# Altium PCB PCB1.pcbdoc
Units mil, origin at the board's own origin, x right, y up, seen from the top; angles counter-clockwise.
Board outline 5554.02 x 5905.51 mil, 2 copper layers (Top Layer, Bottom Layer), stack 62.206 mil thick; 123 components, 66 nets, 348 pads, 126 vias.
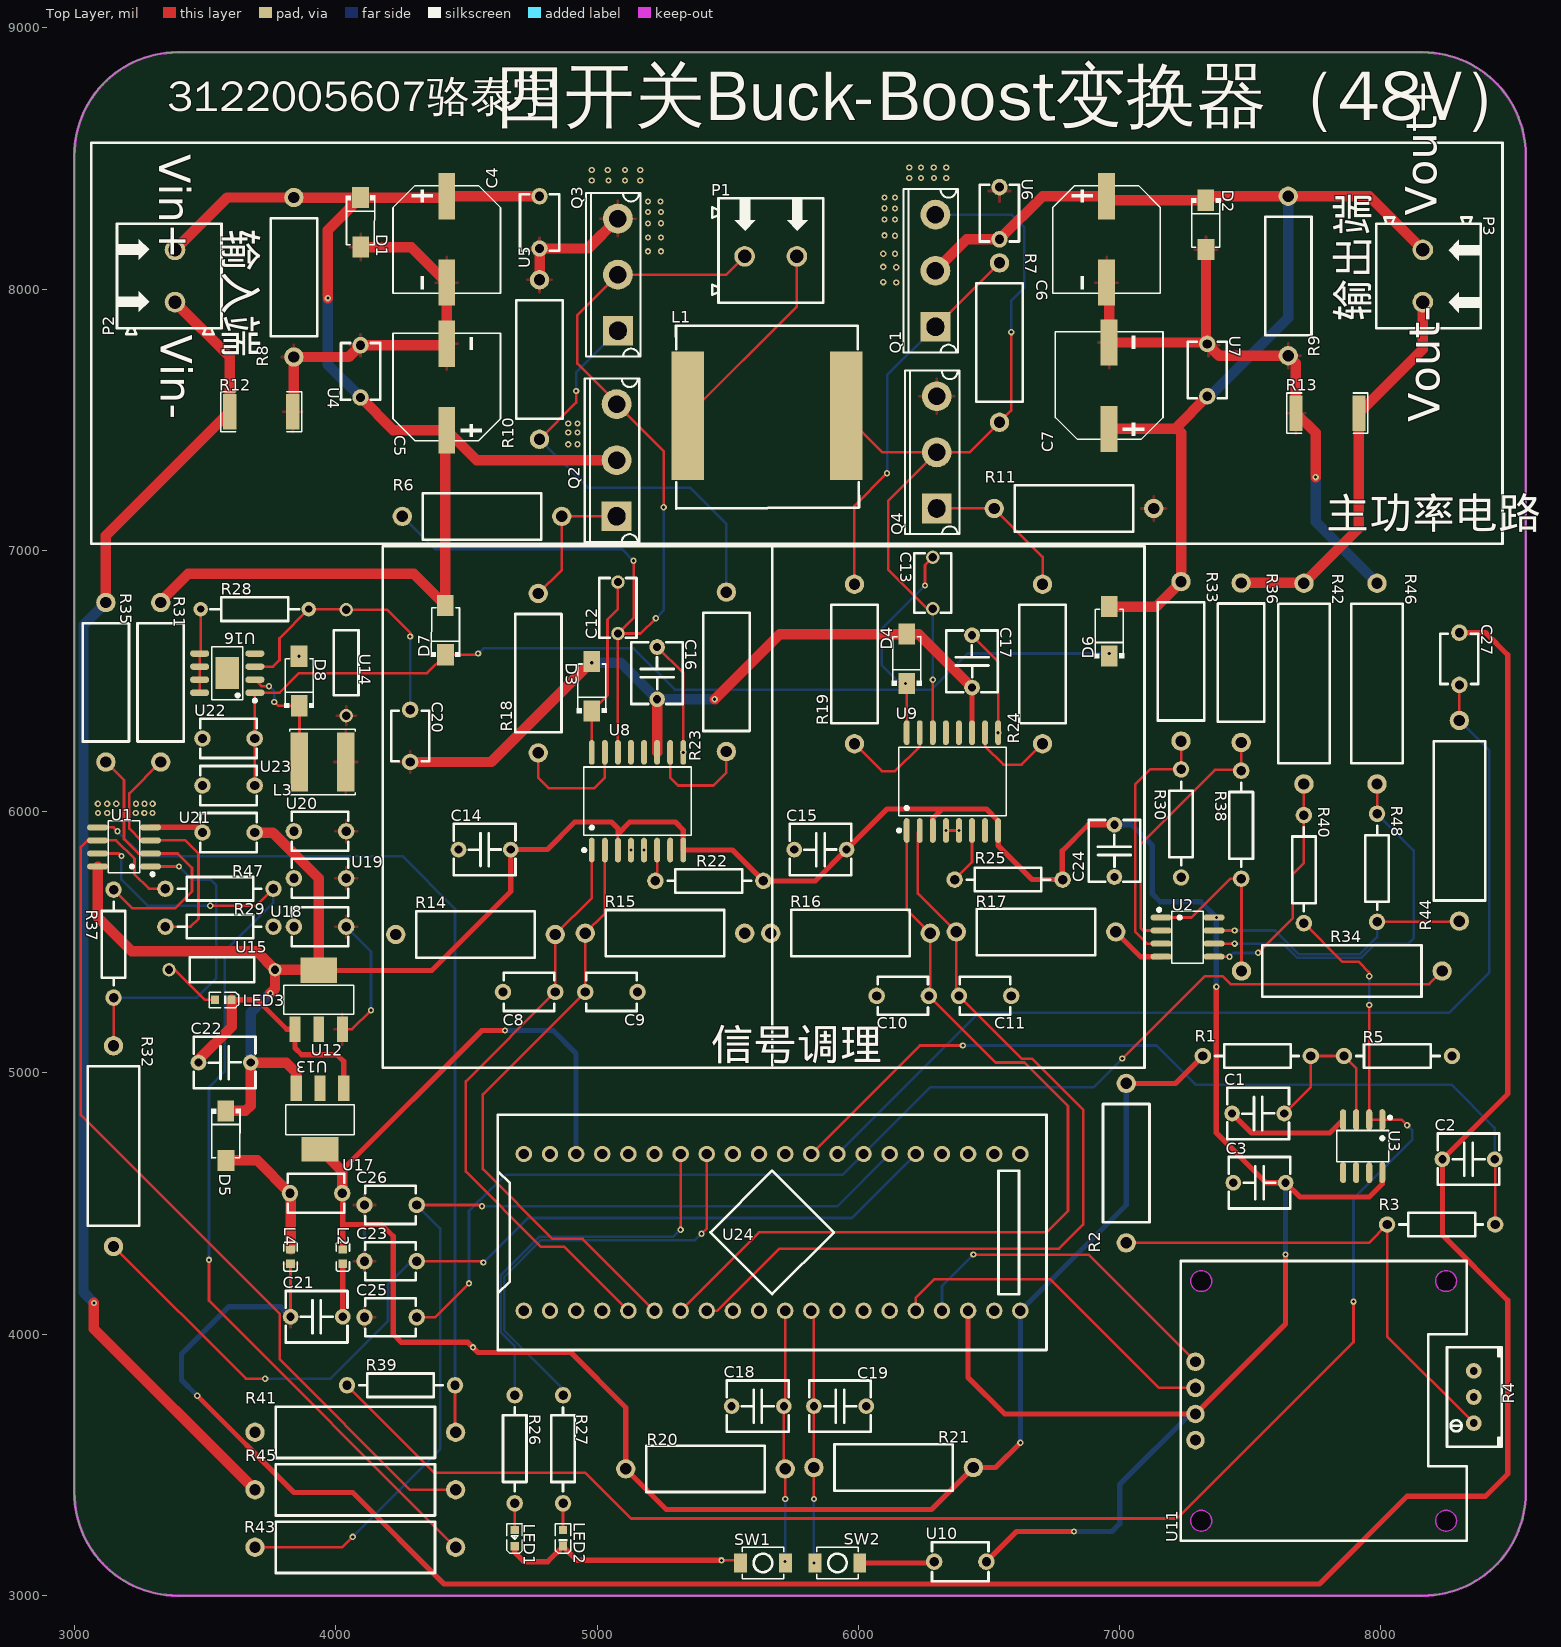
[diagram p0: Top Layer view]
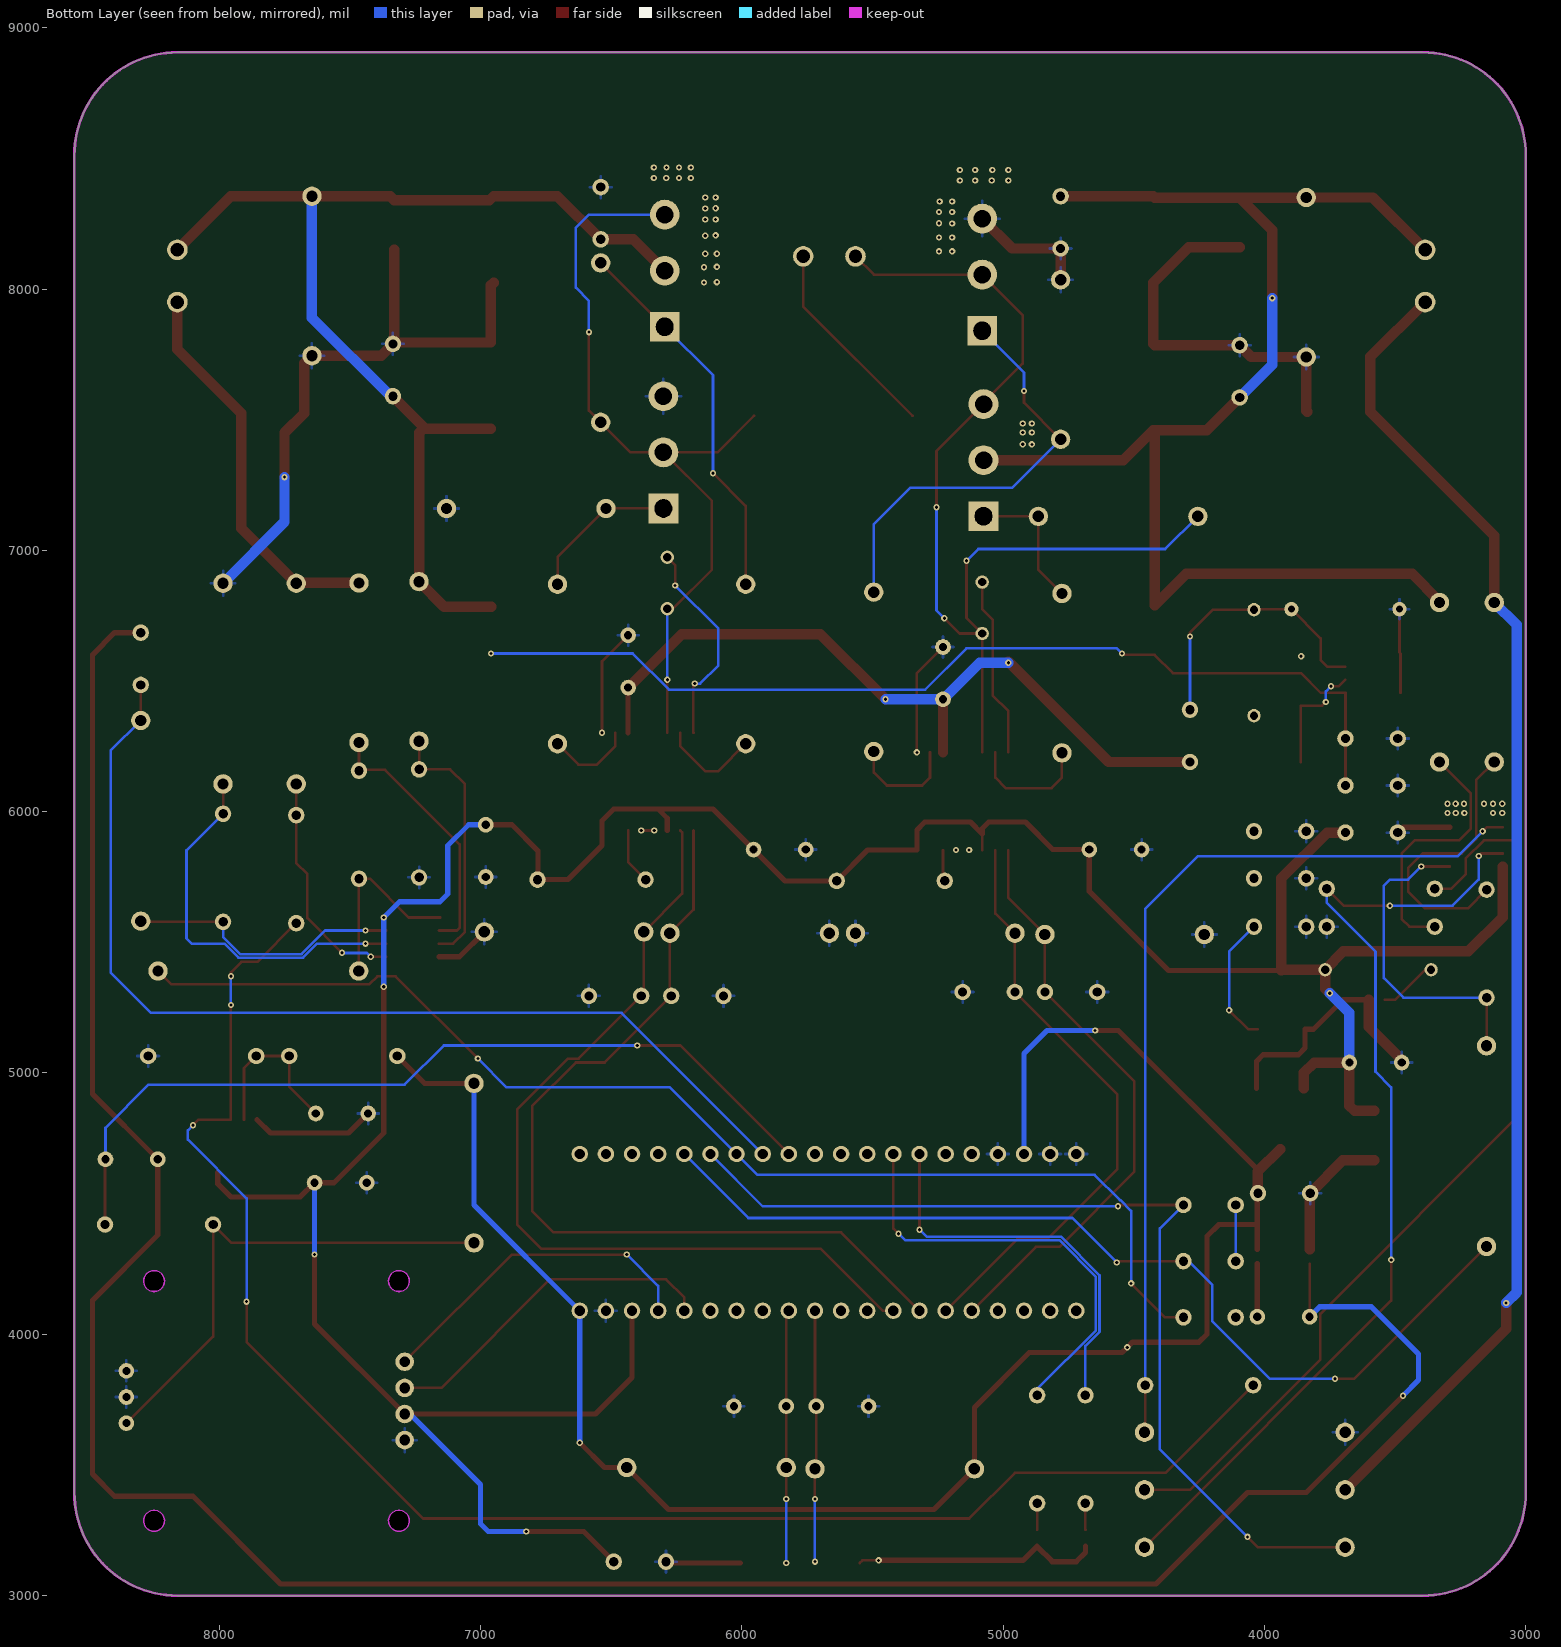
[diagram p1: Bottom Layer view, seen from below]

## Layer stack, top to bottom
Top Solder Mask Layer: solder mask 0.394, Dk 3.3
Top Layer: signal copper 1.379
Dielectric1: surface 59.449, FR4, Dk 4.5
Bottom Layer: signal copper 1.378
Bottom Solder Mask Layer: solder mask 0.394, Dk 3.3

## Board outline
3393.7,8905.51 ccw(c3393.7,8511.81) 3000,8511.81 3000,3393.7 ccw(c3393.7,3393.7) 3393.7,3000 8160.31,3000 ccw(c8160.31,3393.7) 8554.02,3393.7 8554.02,8511.81 ccw(c8160.31,8511.81) 8160.31,8905.51 3393.7,8905.51

## Design rules (kind name [scope] priority, off if disabled: settings)
BoardOutlineClearance copperThickness2oz_1 [All] p2 off: genericclearance=7.99 ignorepadtopadclearanceinfootprint=FALSE except(0: Arc-SplitContinuation Track-SplitContinuation SMDPad-SplitContinuation THPad-SplitContinuation Via-SplitContinuation Fill-SplitContinuation Region-SplitContinuation Poly-SplitContinuation Text-SplitContinuation Hole-SplitContinuation; 5.98: Arc-CutoutEdge SMDPad-CutoutEdge THPad-CutoutEdge Via-CutoutEdge Fill-CutoutEdge Region-CutoutEdge Text-CutoutEdge; 6.93: Hole-OutlineEdge Hole-CutoutEdge; 10: Poly-OutlineEdge Poly-CutoutEdge; 11.81: Arc-OutlineEdge Track-OutlineEdge SMDPad-OutlineEdge THPad-OutlineEdge Via-OutlineEdge Fill-OutlineEdge Region-OutlineEdge Text-OutlineEdge Track-CutoutEdge)
BoardOutlineClearance copperThickness1oz_1 [All] p4: genericclearance=4.02 ignorepadtopadclearanceinfootprint=FALSE except(0: Arc-SplitContinuation Track-SplitContinuation SMDPad-SplitContinuation THPad-SplitContinuation Via-SplitContinuation Fill-SplitContinuation Region-SplitContinuation Poly-SplitContinuation Text-SplitContinuation Hole-SplitContinuation; 6: SMDPad-CutoutEdge THPad-CutoutEdge Via-CutoutEdge Fill-CutoutEdge Region-CutoutEdge Text-CutoutEdge; 6.93: Hole-OutlineEdge Hole-CutoutEdge; 10: Poly-OutlineEdge Poly-CutoutEdge; 11.8: Arc-OutlineEdge Track-OutlineEdge SMDPad-OutlineEdge THPad-OutlineEdge Via-OutlineEdge Fill-OutlineEdge Region-OutlineEdge Text-OutlineEdge; 11.81: Arc-CutoutEdge Track-CutoutEdge)
Clearance copperThickness2oz [All] p1 off: gap=7.99 ignorepadtopadclearanceinfootprint=FALSE except(5.98: SMDPad-Track SMDPad-SMDPad THPad-Track SMDPad-THPad THPad-THPad Track-Via SMDPad-Via THPad-Via Via-Via Fill-Track Region-Track Fill-SMDPad Region-SMDPad Fill-THPad Region-THPad Fill-Via Region-Via Fill-Fill Fill-Region Region-Region Arc-Track Arc-SMDPad Arc-THPad Arc-Via Fill-Arc Region-Arc Arc-Arc Text-Track SMDPad-Text Text-THPad Text-Via Fill-Text Region-Text Arc-Text Text-Text; 6.93: Hole-Track Hole-SMDPad Hole-THPad Hole-Via Fill-Hole Region-Hole Hole-Arc Hole-Text; 10: Poly-Track Poly-SMDPad Poly-THPad Poly-Via Poly-Fill Poly-Region Poly-Poly Poly-Arc Poly-Text Poly-Hole)
Clearance copperThickness1oz [All] p3: gap=4.02 ignorepadtopadclearanceinfootprint=FALSE except(5.98: SMDPad-Track SMDPad-SMDPad THPad-Track SMDPad-THPad THPad-THPad Track-Via SMDPad-Via THPad-Via Via-Via Fill-Track Region-Track Fill-SMDPad Region-SMDPad Fill-THPad Region-THPad Fill-Via Region-Via Fill-Fill Fill-Region Region-Region; 6: Arc-Track Arc-SMDPad Arc-THPad Arc-Via Fill-Arc Region-Arc Arc-Arc Text-Track SMDPad-Text Text-THPad Text-Via Fill-Text Region-Text Arc-Text Text-Text; 6.93: Hole-Track Hole-SMDPad Hole-THPad Hole-Via Fill-Hole Region-Hole Hole-Arc Hole-Text; 10: Poly-Track Poly-SMDPad Poly-THPad Poly-Via Poly-Fill Poly-Region Poly-Poly Poly-Arc Poly-Text Poly-Hole)
DiffPairsRouting differentialPair [All] p1: maxlimit=6 minlimit=6 mostfreqgap=6 toplayer_minwidth=5 toplayer_prefwidth=10 toplayer_maxwidth=100 toplayer_mingap=6 toplayer_prefgap=6 toplayer_maxgap=6 bottomlayer_minwidth=5 bottomlayer_prefwidth=10 bottomlayer_maxwidth=100 bottomlayer_mingap=6 bottomlayer_prefgap=6 bottomlayer_maxgap=6 maxuncoupledlength=10
HoleToHoleClearance otherClearance [All] p1: gap=11.81 allowstackedmicrovias=TRUE
Length netLength [All] p1: minlimit=0 maxlimit=0
MatchedLengths netLengthTolerance [All] p1: tolerance=1000
PasteMaskExpansion pasteMaskExpansion [All] p1: expansion=0
PlaneConnect innerPlane [All] p1: planeconnectstyle=Relief reliefexpansion=20 reliefentries=4 reliefconductorwidth=10 reliefairgap=10
PolygonConnect copperRegion [(InNet('GND') OR InNet('P12V') OR InNet('VIN-') OR InNet('P3V3') OR InNet('P5V') OR InNet('AGND'))] p1: connectstyle=Relief reliefconductorwidth=10 reliefentries=4 polygonreliefangle="90 Angle" airgapwidth=10 via.connectstyle=Relief via.reliefconductorwidth=10 via.reliefentries=4 via.polygonreliefangle="90 Angle" via.airgapwidth=10
RoutingVias viaSize [All] p1: holewidth=12.01 width=24.02 viastyle="Through Hole" minholewidth=11.81 minwidth=19.68 maxholewidth=248.03 maxwidth=393.7
SolderMaskExpansion solderMaskExpansion [IsVia] p1: expansion=-1000 istentingtop=TRUE
SolderMaskExpansion solderMaskExpansion [All] p2: expansion=2 istentingtop=FALSE
Width copperThickness2oz_2 [All] p1 off: maxlimit=100 minlimit=8 preferedwidth=10
Width copperThickness1oz_2 [All] p2: maxlimit=100 minlimit=5 preferedwidth=10

## Components (designator, comment, footprint, x,y, rotation, side; value= is the part's Value field where it differs from the comment)
C1 "470nF" CAP-TH_L6.0-W5.0-P5.08-D0.5 7530,4845 r0 top
C2 "470nF" CAP-TH_L6.0-W5.0-P5.08-D0.5 8335,4670 r0 top
C3 "470nF" CAP-TH_L6.0-W5.0-P5.08-D0.5 7535,4580 r0 top
C4 "220uF" CAP-SMD_BD10.0-L10.3-W10.3-FD-LS11.0 4425,8190 r270 top
C5 "220uF" CAP-SMD_BD10.0-L10.3-W10.3-FD-LS11.0 4425,7625 r90 top
C6 "220uF" CAP-SMD_BD10.0-L10.3-W10.3-FD-LS11.0 6950,8190 r270 top
C7 "220uF" CAP-SMD_BD10.0-L10.3-W10.3-FD-LS11.0 6960,7630 r90 top
C8 "330pF" CAP-TH_L4.9-W3.7-P5.08-D0.5 4740,5310 r180 top
C9 "330pF" CAP-TH_L4.9-W3.7-P5.08-D0.5 5055,5310 r0 top
C10 "330pF" CAP-TH_L4.9-W3.7-P5.08-D0.5 6170,5295 r180 top
C11 "330pF" CAP-TH_L4.9-W3.7-P5.08-D0.5 6485,5295 r0 top
C12 "100nF" CAP-TH_L5.8-W3.6-P5.0-D0.6 5080,6780 r270 top
C13 "100nF" CAP-TH_L5.8-W3.6-P5.0-D0.6 6285,6875 r270 top
C14 "470nF" CAP-TH_L6.0-W5.0-P5.08-D0.5 4570,5855 r0 top
C15 "470nF" CAP-TH_L6.0-W5.0-P5.08-D0.5 5855,5855 r0 top
C16 "470nF" CAP-TH_L6.0-W5.0-P5.08-D0.5 5230,6530 r270 top
C17 "470nF" CAP-TH_L6.0-W5.0-P5.08-D0.5 6435,6575 r270 top
C18 "470nF" CAP-TH_L6.0-W5.0-P5.08-D0.5 5615,3725 r0 top
C19 "470nF" CAP-TH_L6.0-W5.0-P5.08-D0.5 5930,3725 r180 top
C20 "330pF" CAP-TH_L4.9-W3.7-P5.08-D0.5 4285,6290 r270 top
C21 "470nF" CAP-TH_L6.0-W5.0-P5.08-D0.5 3927.18,4067.18 r0 top
C22 "470nF" CAP-TH_L6.0-W5.0-P5.08-D0.5 3575,5040 r0 top
C23 "330pF" CAP-TH_L4.9-W3.7-P5.08-D0.5 4210,4280 r0 top
C24 "470nF" CAP-TH_L6.0-W5.0-P5.08-D0.5 6980,5850 r90 top
C25 "330pF" CAP-TH_L4.9-W3.7-P5.08-D0.5 4210,4065 r0 top
C26 "330pF" CAP-TH_L4.9-W3.7-P5.08-D0.5 4210,4495 r0 top
C27 "330pF" CAP-TH_L4.9-W3.7-P5.08-D0.5 8300,6585 r270 top
D1 "SS210" SMA_L4.3-W2.6-LS5.0-RD 4095,8255 r270 top
D2 "SS210" SMA_L4.3-W2.6-LS5.0-RD 7330,8245 r270 top
D3 "SS210" SMA_L4.3-W2.6-LS5.0-RD 4980,6480 r90 top
D4 "SS210" SMA_L4.3-W2.6-LS5.0-RD 6185,6585 r90 top
D5 "SS210" SMA_L4.3-W2.6-LS5.0-RD 3580,4760 r270 top
D6 "SS210" SMA_L4.3-W2.6-LS5.0-RD 6960,6690 r90 top
D7 "SS210" SMA_L4.3-W2.6-LS5.0-RD 4420,6695 r90 top
D8 "SS210" SMA_L4.3-W2.6-LS5.0-RD 3860,6500 r90 top
L1 "22uH" IND-SMD_2P-L16.9-W16.9 5650,7515 r0 top
L2 "10uH" L0603 4027.18,4297.18 r270 top
L3 "100uH" IND-SMD_L6.0-W6.0_CR6020 3950,6190 r0 top
L4 "10uH" L0603 3827.18,4297.18 r270 top
LED1 "XL-1608UYC-06" LED0603-RD-YELLOW 4685,3220 r90 top
LED2 "XL-1608UGC-04" LED0603-RD_GREEN 4870,3220 r90 top
LED3 "XL-1608UGC-04" LED0603-RD_GREEN 3570,5280 r180 top
P1 "WJ500V-5.08-2P" CONN-TH_2P-P5.00_WJ500V-5.08-2P 5665,8125 r0 top
P2 "WJ500V-5.08-2P" CONN-TH_2P-P5.00_WJ500V-5.08-2P 3385,8050 r90 top
P3 "WJ500V-5.08-2P" CONN-TH_2P-P5.00_WJ500V-5.08-2P 8160,8050 r270 top
Q1 "IRFP4468PBF" TO-247AC-3_L15.8-W5.0-P5.46-L 6295,8070 r90 top
Q2 "IRFP4468PBF" TO-247AC-3_L15.8-W5.0-P5.46-L 5075,7345 r90 top
Q3 "IRFP4468PBF" TO-247AC-3_L15.8-W5.0-P5.46-L 5080,8055 r90 top
Q4 "IRFP4468PBF" TO-247AC-3_L15.8-W5.0-P5.46-L 6300,7375 r90 top
R1 "3.3kΩ" RES-TH_BD2.2-L6.5-P10.50-D0.6 7525,5065 r0 top
R2 "10kΩ" RES-TH_BD4.5-L11.5-P15.50-D0.7 7025,4655 r90 top
R3 "3.3kΩ" RES-TH_BD2.2-L6.5-P10.50-D0.6 8230,4420 r0 top
R4 "50kΩ" RES-ADJ-TH_3296W 8355,3760 r180 top
R5 "3.3kΩ" RES-TH_BD2.2-L6.5-P10.50-D0.6 8065,5065 r180 top
R6 "10kΩ" RES-TH_BD4.5-L11.5-P15.50-D0.7 4560,7130 r0 top
R7 "10kΩ" RES-TH_BD4.5-L11.5-P15.50-D0.7 6540,7795 r270 top
R8 "10kΩ" RES-TH_BD4.5-L11.5-P15.50-D0.7 3840,8045 r90 top
R9 "10kΩ" RES-TH_BD4.5-L11.5-P15.50-D0.7 7645,8050 r90 top
R10 "10kΩ" RES-TH_BD4.5-L11.5-P15.50-D0.7 4780,7730 r90 top
R11 "10kΩ" RES-TH_BD4.5-L11.5-P15.50-D0.7 6825,7160 r0 top
R12 "1mΩ" R2512 3715,7530 r0 top
R13 "1mΩ" R2512 7795,7525 r180 top
R14 "10kΩ" RES-TH_BD4.5-L11.5-P15.50-D0.7 4535,5530 r180 top
R15 "10kΩ" RES-TH_BD4.5-L11.5-P15.50-D0.7 5260,5535 r0 top
R16 "10kΩ" RES-TH_BD4.5-L11.5-P15.50-D0.7 5970,5535 r180 top
R17 "10kΩ" RES-TH_BD4.5-L11.5-P15.50-D0.7 6680,5540 r0 top
R18 "10Ω" RES-TH_BD4.5-L11.5-P15.50-D0.7 4775,6530 r90 top
R19 "10Ω" RES-TH_BD4.5-L11.5-P15.50-D0.7 5985,6565 r90 top
R20 "10kΩ" RES-TH_BD4.5-L11.5-P15.50-D0.7 5415,3485 r180 top
R21 "10kΩ" RES-TH_BD4.5-L11.5-P15.50-D0.7 6135,3490 r0 top
R22 "3.3kΩ" RES-TH_BD2.2-L6.5-P10.50-D0.6 5430,5735 r180 top
R23 "10Ω" RES-TH_BD4.5-L11.5-P15.50-D0.7 5495,6535 r90 top
R24 "10Ω" RES-TH_BD4.5-L11.5-P15.50-D0.7 6705,6565 r90 top
R25 "3.3kΩ" RES-TH_BD2.2-L6.5-P10.50-D0.6 6575,5740 r180 top
R26 "3.3kΩ" RES-TH_BD2.2-L6.5-P10.50-D0.6 4685,3560 r90 top
R27 "3.3kΩ" RES-TH_BD2.2-L6.5-P10.50-D0.6 4870,3560 r90 top
R28 "4.7kΩ" RES-TH_BD2.3-L6.5-P10.50-D0.5 3690,6775 r0 top
R29 "3.3kΩ" RES-TH_BD2.2-L6.5-P10.50-D0.6 3555,5560 r0 top
R30 "3.3kΩ" RES-TH_BD2.2-L6.5-P10.50-D0.6 7235,5955 r270 top
R31 "68kΩ" RES-TH_BD4.5-L11.5-P15.50-D0.7 3330.42,6495 r270 top
R32 "100Ω" RES-TH_BD5.0-L15.5-P19.50-D0.70 3150,4720 r270 top
R33 "68kΩ" RES-TH_BD4.5-L11.5-P15.50-D0.7 7235,6575 r270 top
R34 "100Ω" RES-TH_BD5.0-L15.5-P19.50-D0.70 7850,5390 r0 top
R35 "68kΩ" RES-TH_BD4.5-L11.5-P15.50-D0.7 3120.42,6495 r270 top
R36 "68kΩ" RES-TH_BD4.5-L11.5-P15.50-D0.7 7465,6570 r270 top
R37 "3.3kΩ" RES-TH_BD2.2-L6.5-P10.50-D0.6 3150,5495 r270 top
R38 "3.3kΩ" RES-TH_BD2.2-L6.5-P10.50-D0.6 7465,5950 r270 top
R39 "15kΩ" RES-TH_BD2.2-L6.5-P10.50-D0.6 4250,3805 r180 top
R40 "15kΩ" RES-TH_BD2.2-L6.5-P10.50-D0.6 7705,5780 r270 top
R41 "100Ω" RES-TH_BD5.0-L15.5-P19.50-D0.70 4075,3625 r0 top
R42 "100Ω" RES-TH_BD5.0-L15.5-P19.50-D0.70 7705,6490 r270 top
R43 "100Ω" RES-TH_BD5.0-L15.5-P19.50-D0.70 4075,3185 r180 top
R44 "100Ω" RES-TH_BD5.0-L15.5-P19.50-D0.70 8300,5965 r90 top
R45 "100Ω" RES-TH_BD5.0-L15.5-P19.50-D0.70 4075,3405 r0 top
R46 "100Ω" RES-TH_BD5.0-L15.5-P19.50-D0.70 7985,6490 r270 top
R47 "15kΩ" RES-TH_BD2.2-L6.5-P10.50-D0.6 3555,5705 r0 top
R48 "15kΩ" RES-TH_BD2.2-L6.5-P10.50-D0.6 7985,5785 r270 top
SW1 "TS-1088-AR02016" SW-SMD_L3.9-W3.0-P4.45 5635,3125 r0 top
SW2 "TS-1088-AR02016" SW-SMD_L3.9-W3.0-P4.45 5920,3125 r180 top
U1 "GS8552-SR" SOIC-8_L4.9-W3.9-P1.27-LS6.0-BL 3190,5865 r90 top
U2 "GS8552-SR" SOIC-8_L4.9-W3.9-P1.27-LS6.0-BL 7260,5520 r270 top
U3 "GS8552-SR" SOIC-8_L4.9-W3.9-P1.27-LS6.0-BL 7930,4720 r180 top
U4 "10uF" CAP-TH_L5.5-W3.8-P5.08-D0.5 4095,7685 r270 top
U5 "10uF" CAP-TH_L5.5-W3.8-P5.08-D0.5 4780,8255 r90 top
U6 "10uF" CAP-TH_L5.5-W3.8-P5.08-D0.5 6540,8290 r270 top
U7 "10uF" CAP-TH_L5.5-W3.8-P5.08-D0.5 7335,7690 r270 top
U8 "SI8233BD-D-IS" SOIC-16_L10.3-W7.5-P1.27-LS10.3-BL 5155,6040 r0 top
U9 "SI8233BD-D-IS" SOIC-16_L10.3-W7.5-P1.27-LS10.3-BL 6360,6115 r0 top
U10 "10uF" CAP-TH_L5.5-W3.8-P5.08-D0.5 6390,3130 r0 top
U11 "HS96L03W2C03" OLED-TH_L27.8-W27.2-P2.54_C9900033791 7290,3745 r90 top
U12 "AMS1117-5.0" SOT-223_L6.5-W3.5-P2.30-LS7.0-BR 3935,5280 r270 top
U13 "AMS1117-3.3" SOT-223-3_L6.5-W3.4-P2.30-LS7.0-BR 3940,4825 r90 top
U14 "33kΩ" RES-TH_BD2.4-L6.3-P10.30-D0.6 4040,6570 r270 top
U15 "33kΩ" RES-TH_BD2.4-L6.3-P10.30-D0.6 3565,5395 r0 top
U16 "XL7005A" SOIC-8_L4.9-W3.9-P1.27-LS6.0-BL-EP3.1-1 3585,6530 r90 top
U17 "10uF" CAP-TH_L5.5-W3.8-P5.08-D0.5 3925,4540 r0 top
U18 "10uF" CAP-TH_L5.5-W3.8-P5.08-D0.5 3940,5560 r0 top
U19 "10uF" CAP-TH_L5.5-W3.8-P5.08-D0.5 3940,5745 r0 top
U20 "10uF" CAP-TH_L5.5-W3.8-P5.08-D0.5 3940,5925 r0 top
U21 "10uF" CAP-TH_L5.5-W3.8-P5.08-D0.5 3590,5920 r0 top
U22 "10uF" CAP-TH_L5.5-W3.8-P5.08-D0.5 3590,6280 r0 top
U23 "10uF" CAP-TH_L5.5-W3.8-P5.08-D0.5 3590,6100 r0 top
U24 "LCKFB-DKX-STM32F103C8T6" CONN-TH_L53.3-W22.9_STM32F103C8T6-CARD 5670,4390 r0 top

## Footprints (in the part's own frame and the unit in brackets; to place one, negate y for a bottom-side part, rotate by r counter-clockwise, add the part's x,y. Pads: shape width x height; smd on the part's side, far side on the other; paste and mask are expansions set on the pad)
CAP-SMD_BD10.0-L10.3-W10.3-FD-LS11.0 [mm]
  rect 4.5x1.65 smd: 1(-4.2,0) 2(4.2,0)
  silkscreen extent -5.23,-5.23 5.23,5.23
CAP-TH_L4.9-W3.7-P5.08-D0.5 [mm]
  round 1.6 hole 0.9: 1(-2.54,0) 2(2.54,0)
  silkscreen extent -2.45,-1.85 2.45,1.85
CAP-TH_L5.5-W3.8-P5.08-D0.5 [mm]
  round 1.6 hole 0.9: 1(-2.54,0) 2(2.54,0)
  silkscreen extent -2.75,-1.9 2.75,1.9
CAP-TH_L5.8-W3.6-P5.0-D0.6 [mm]
  round 1.3 hole 0.8 paste+0 mask+0.05: 1(-2.5,0)
  round 1.3 hole 0.8 copper offset 0,0 paste+0 mask+0.05: 2(2.5,0)
  silkscreen extent -2.9,-1.8 2.9,1.8
CAP-TH_L6.0-W5.0-P5.08-D0.5 [mil]
  round 60 hole 31.5: 1(-100,0) 2(100,0)
  silkscreen extent -118,-98 118,98
CONN-TH_2P-P5.00_WJ500V-5.08-2P [mm]
  round 2 hole 1.3: 1(-2.54,0) 2(2.54,0)
  silkscreen extent -5.68,-4.52 5.08,5.64
CONN-TH_L53.3-W22.9_STM32F103C8T6-CARD [mm]
  round 1.6 hole 1: 1(-24.13,-7.62) 2(-21.59,-7.62) 3(-19.05,-7.62) 4(-16.51,-7.62) 5(-13.97,-7.62) 6(-11.43,-7.62) 7(-8.89,-7.62) 8(-6.35,-7.62) 9(-3.81,-7.62) 10(-1.27,-7.62) 11(1.27,-7.62) 12(3.81,-7.62) 13(6.35,-7.62) 14(8.89,-7.62) 15(11.43,-7.62) 16(13.97,-7.62) 17(16.51,-7.62) 18(19.05,-7.62) 19(21.59,-7.62) 20(24.13,-7.62) 21(24.13,7.62) 22(21.59,7.62) 23(19.05,7.62) 24(16.51,7.62) 25(13.97,7.62) 26(11.43,7.62) 27(8.89,7.62) 28(6.35,7.62) 29(3.81,7.62) 30(1.27,7.62) 31(-1.27,7.62) 32(-3.81,7.62) 33(-6.35,7.62) 34(-8.89,7.62) 35(-11.43,7.62) 36(-13.97,7.62) 37(-16.51,7.62) 38(-19.05,7.62) 39(-21.59,7.62) 40(-24.13,7.62)
  silkscreen extent -26.67,-11.43 26.67,11.43
IND-SMD_2P-L16.9-W16.9 [mm]
  rect 3.15x12.5 smd: 1(-7.7,0) 2(7.7,0)
  silkscreen extent -8.83,-9.02 8.96,8.76
IND-SMD_L6.0-W6.0_CR6020 [mm]
  rect 1.7x5.7 smd: 1(-2.25,0) 2(2.25,0)
  silkscreen extent -3.18,-3.18 3.18,3.18
L0603 [mm]
  rect 0.8x0.864 smd paste-100 mask+0.051: 1(-0.7,0) 2(0.7,0)
  silkscreen extent -1.42,-0.65 1.42,0.65
LED0603-RD-YELLOW [mm]
  rect 0.8x0.8 smd: 1(-0.799,-0.003) 2(0.799,0.003)
  silkscreen extent -1.49,-0.75 1.39,0.76
LED0603-RD_GREEN [mm]
  rect 0.8x0.8 smd: 1(-0.799,-0.003) 2(0.799,0.003)
  silkscreen extent -1.49,-0.75 1.39,0.76
OLED-TH_L27.8-W27.2-P2.54_C9900033791 [mm]
  round 1.8 hole 1.05 paste+0 mask+0.05: 1(-3.81,0) 2(-1.27,0) 3(1.27,0) 4(3.81,0)
  Board Outline Layer circle w0.003: c-11.65,-0.56 r1.016
  Board Outline Layer circle w0.003: c11.65,-0.56 r1.016
  Board Outline Layer circle w0.003: c-11.65,-24.36 r1.016
  Board Outline Layer circle w0.003: c11.65,-24.36 r1.016
  Board Outline Layer region: -11.65,-1.576 -12.091,-1.475 -12.444,-1.193 -12.64,-0.786 -12.64,-0.334 -12.444,0.073 -12.091,0.355 -11.65,0.456 -11.65,0.456 -11.209,0.355 -10.856,0.073 -10.659,-0.334 -10.659,-0.786 -10.856,-1.193 -11.209,-1.475 -11.65,-1.576
  Board Outline Layer region: -11.65,-1.576 -11.788,-1.567 -11.924,-1.538 -12.055,-1.492 -12.178,-1.428 -12.291,-1.348 -12.392,-1.253 -12.48,-1.146 -12.552,-1.027 -12.607,-0.9 -12.645,-0.767 -12.664,-0.629 -12.664,-0.491 -12.645,-0.353 -12.607,-0.22 -12.552,-0.093 -12.48,0.026 -12.392,0.133 -12.291,0.228 -12.178,0.308 -12.055,0.372 -11.924,0.418 -11.788,0.447 -11.65,0.456 -11.512,0.447 -11.376,0.418 -11.245,0.372 -11.122,0.308 -11.009,0.228 -10.907,0.133 -10.82,0.026 -10.748,-0.093 -10.693,-0.22 -10.655,-0.353 -10.636,-0.491 -10.636,-0.629 -10.655,-0.767 -10.693,-0.9 -10.748,-1.027 -10.82,-1.146 -10.907,-1.253 -11.009,-1.348 -11.122,-1.428 -11.245,-1.492 -11.376,-1.538 -11.512,-1.567
  Board Outline Layer region: 11.65,-1.576 11.209,-1.475 10.856,-1.193 10.659,-0.786 10.659,-0.334 10.856,0.073 11.209,0.355 11.65,0.456 11.65,0.456 12.091,0.355 12.444,0.073 12.641,-0.334 12.641,-0.786 12.444,-1.193 12.091,-1.475 11.65,-1.576
  Board Outline Layer region: 11.65,-1.576 11.512,-1.567 11.376,-1.538 11.245,-1.492 11.122,-1.428 11.009,-1.348 10.907,-1.253 10.82,-1.146 10.748,-1.027 10.693,-0.9 10.655,-0.767 10.636,-0.629 10.636,-0.491 10.655,-0.353 10.693,-0.22 10.748,-0.093 10.82,0.026 10.907,0.133 11.009,0.228 11.122,0.308 11.245,0.372 11.376,0.418 11.512,0.447 11.65,0.456 11.788,0.447 11.924,0.418 12.055,0.372 12.178,0.308 12.291,0.228 12.393,0.133 12.48,0.026 12.552,-0.093 12.607,-0.22 12.645,-0.353 12.664,-0.491 12.664,-0.629 12.645,-0.767 12.607,-0.9 12.552,-1.027 12.48,-1.146 12.393,-1.253 12.291,-1.348 12.178,-1.428 12.055,-1.492 11.924,-1.538 11.788,-1.567
  Board Outline Layer region: -11.65,-25.376 -12.091,-25.275 -12.444,-24.993 -12.64,-24.586 -12.64,-24.134 -12.444,-23.726 -12.091,-23.445 -11.65,-23.344 -11.65,-23.344 -11.209,-23.445 -10.856,-23.726 -10.659,-24.134 -10.659,-24.586 -10.856,-24.993 -11.209,-25.275 -11.65,-25.376
  Board Outline Layer region: -11.65,-25.376 -11.788,-25.366 -11.924,-25.338 -12.055,-25.292 -12.178,-25.228 -12.291,-25.148 -12.392,-25.053 -12.48,-24.946 -12.552,-24.827 -12.607,-24.7 -12.645,-24.567 -12.664,-24.429 -12.664,-24.291 -12.645,-24.153 -12.607,-24.02 -12.552,-23.893 -12.48,-23.774 -12.392,-23.666 -12.291,-23.572 -12.178,-23.492 -12.055,-23.428 -11.924,-23.382 -11.788,-23.353 -11.65,-23.344 -11.512,-23.353 -11.376,-23.382 -11.245,-23.428 -11.122,-23.492 -11.009,-23.572 -10.907,-23.666 -10.82,-23.774 -10.748,-23.893 -10.693,-24.02 -10.655,-24.153 -10.636,-24.291 -10.636,-24.429 -10.655,-24.567 -10.693,-24.7 -10.748,-24.827 -10.82,-24.946 -10.907,-25.053 -11.009,-25.148 -11.122,-25.228 -11.245,-25.292 -11.376,-25.338 -11.512,-25.366
  Board Outline Layer region: 11.65,-25.376 11.209,-25.275 10.856,-24.993 10.659,-24.586 10.659,-24.134 10.856,-23.726 11.209,-23.445 11.65,-23.344 11.65,-23.344 12.091,-23.445 12.444,-23.726 12.641,-24.134 12.641,-24.586 12.444,-24.993 12.091,-25.275 11.65,-25.376
  Board Outline Layer region: 11.65,-25.376 11.512,-25.366 11.376,-25.338 11.245,-25.292 11.122,-25.228 11.009,-25.148 10.907,-25.053 10.82,-24.946 10.748,-24.827 10.693,-24.7 10.655,-24.567 10.636,-24.429 10.636,-24.291 10.655,-24.153 10.693,-24.02 10.748,-23.893 10.82,-23.774 10.907,-23.666 11.009,-23.572 11.122,-23.492 11.245,-23.428 11.376,-23.382 11.512,-23.353 11.65,-23.344 11.788,-23.353 11.924,-23.382 12.055,-23.428 12.178,-23.492 12.291,-23.572 12.393,-23.666 12.48,-23.774 12.552,-23.893 12.607,-24.02 12.645,-24.153 12.664,-24.291 12.664,-24.429 12.645,-24.567 12.607,-24.7 12.552,-24.827 12.48,-24.946 12.393,-25.053 12.291,-25.148 12.178,-25.228 12.055,-25.292 11.924,-25.338 11.788,-25.366
  Multi-Layer board cut-out: -11.65,-1.576 -12.091,-1.475 -12.444,-1.193 -12.64,-0.786 -12.64,-0.334 -12.444,0.073 -12.091,0.355 -11.65,0.456 -11.65,0.456 -11.209,0.355 -10.856,0.073 -10.659,-0.334 -10.659,-0.786 -10.856,-1.193 -11.209,-1.475 -11.65,-1.576
  Multi-Layer board cut-out: 11.65,-1.576 11.209,-1.475 10.856,-1.193 10.659,-0.786 10.659,-0.334 10.856,0.073 11.209,0.355 11.65,0.456 11.65,0.456 12.091,0.355 12.444,0.073 12.641,-0.334 12.641,-0.786 12.444,-1.193 12.091,-1.475 11.65,-1.576
  Multi-Layer board cut-out: -11.65,-25.376 -12.091,-25.275 -12.444,-24.993 -12.64,-24.586 -12.64,-24.134 -12.444,-23.726 -12.091,-23.445 -11.65,-23.344 -11.65,-23.344 -11.209,-23.445 -10.856,-23.726 -10.659,-24.134 -10.659,-24.586 -10.856,-24.993 -11.209,-25.275 -11.65,-25.376
  Multi-Layer board cut-out: 11.65,-25.376 11.209,-25.275 10.856,-24.993 10.659,-24.586 10.659,-24.134 10.856,-23.726 11.209,-23.445 11.65,-23.344 11.65,-23.344 12.091,-23.445 12.444,-23.726 12.641,-24.134 12.641,-24.586 12.444,-24.993 12.091,-25.275 11.65,-25.376
  silkscreen extent -13.6,-26.36 13.6,1.44
R2512 [mil]
  rect 50.49x136.06 smd paste-3937.01 mask+2: 1(-120.72,0) 2(120.72,0)
  silkscreen extent -155,-77 155,77
RES-ADJ-TH_3296W [mil]
  round 60 hole 30: 1(0,100.01) 2(0,0.01) 3(0,-99.99)
  silkscreen extent -108,-190 102,190
RES-TH_BD2.2-L6.5-P10.50-D0.6 [mm]
  round 1.6 hole 0.914: 1(-5.25,0) 2(5.25,0)
  silkscreen extent -4.06,-1.14 4.06,1.14
RES-TH_BD2.3-L6.5-P10.50-D0.5 [mm]
  round 1.4 hole 0.7: 1(-5.25,0) 2(5.25,0)
  silkscreen extent -4.32,-1.15 4.32,1.15
RES-TH_BD2.4-L6.3-P10.30-D0.6 [mm]
  round 1.3 hole 0.8: 1(-5.15,0) 2(5.15,0)
  silkscreen extent -3.15,-1.2 3.15,1.2
RES-TH_BD4.5-L11.5-P15.50-D0.7 [mil]
  round 74 hole 43.31: 1(-305.12,0) 2(305.12,0)
  silkscreen extent -226,-89 226,89
RES-TH_BD5.0-L15.5-P19.50-D0.70 [mil]
  round 74 hole 43.31: 1(-383.86,0) 2(383.86,0)
  silkscreen extent -305,-98 305,98
SMA_L4.3-W2.6-LS5.0-RD [mm]
  rect 2.046x1.62 smd: 1(-2.404,-0.009) 2(2.404,0.009)
  silkscreen extent -2.61,-1.44 2.16,1.44
SOIC-8_L4.9-W3.9-P1.27-LS6.0-BL [mm]
  oval 0.588x2.045 smd: 1(-1.905,-2.57) 2(-0.635,-2.57) 3(0.635,-2.57) 4(1.905,-2.57) 5(1.905,2.57) 6(0.635,2.57) 7(-0.635,2.57) 8(-1.905,2.57)
  silkscreen extent -2.8,-2.92 2.53,1.52
SOIC-8_L4.9-W3.9-P1.27-LS6.0-BL-EP3.1-1 [mm]
  oval 0.63x1.865 smd: 1(-1.905,-2.683) 2(-0.635,-2.683) 3(0.635,-2.683) 4(1.905,-2.683) 5(1.905,2.682) 6(0.635,2.682) 7(-0.635,2.682) 8(-1.905,2.682)
  rect 3.1x2.3 smd paste+0 mask+0.05: 9(0,0)
  silkscreen extent -2.82,-2.83 2.58,1.52
SOIC-16_L10.3-W7.5-P1.27-LS10.3-BL [mil]
  oval 22.6x94.51 smd: 1(-175,-187.02) 2(-125,-187.02) 3(-75,-187.02) 4(-25,-187.02) 5(25,-187.02) 6(75,-187.02) 7(125,-187.02) 8(175,-187.02) 9(175,187.02) 10(125,187.02) 11(75,187.02) 12(25,187.02) 13(-25,187.02) 14(-75,187.02) 15(-125,187.02) 16(-175,187.02)
  silkscreen extent -210,-193 206,131
SOT-223-3_L6.5-W3.4-P2.30-LS7.0-BR [mm]
  rect 2.5x1.1 smd: 1(2.97,-2.3) 2(2.97,0) 3(2.97,2.3)
  rect 2.34x3.6 smd: 4(-2.97,0)
  silkscreen extent -1.57,-3.33 1.37,3.33
SOT-223_L6.5-W3.5-P2.30-LS7.0-BR [mm]
  rect 2.465x1.05 smd: 1(2.858,-2.3) 2(2.857,0) 3(2.857,2.3)
  rect 2.465x3.54 smd: 4(-2.857,0)
  silkscreen extent -1.4,-3.4 1.4,3.4
SW-SMD_L3.9-W3.0-P4.45 [mm]
  rect 1.23x1.86 smd: 1(-2.185,0) 2(2.185,0)
  silkscreen extent -2.03,-1.54 2.03,1.54
TO-247AC-3_L15.8-W5.0-P5.46-L [mm]
  rect 2.9x2.9 hole 1.7 slot 1.785 at 0 deg copper offset -0.001,0: 1(-5.449,0)
  round 2.9 hole 1.7: 2(0,0) 3(5.45,0)
  silkscreen extent -7.95,-2.2 7.95,3.1

## Via types
v1: diameter 24.02, hole 12, Top Layer to Bottom Layer, 126 vias

## Nets (pads, with @x,y where several pads share a name; then routed paths per layer and width w, separated by ;. In a path a pad name is that pad's centre, name@x,y a point inside that pad or via, vN(x,y) a via of type N, cw(c..) or ccw(c..) an arc to the next point about the centre after c; other vN are vias at no path point)
$1N21: R22.2 U8.6 | length 120.8
  Top Layer w10: R22.2 5230,5741.69 U8.6
$1N24: C12.1 D3.1 U8.16 | length 692.8
  Top Layer w10: U8.16 4980.37,6227.39 D3.1 5040,6444.98 5040,6735 5080,6775 C12.1
$1N26: R18.1 U8.15 | length 480
  Top Layer w10: R18.1 4775,6130 4815,6090 4990,6090 5030,6130 U8.15
$1N30: R23.1 U8.10 | length 425
  Top Layer w10: U8.10 5280,6130 5310,6100 5445,6100 5495,6150 R23.1
$1N37: R24.1 U9.10 | length 334.1
  Top Layer w10: U9.10 6485,6250 6555,6180 6625.12,6180 R24.1
$1N41: R19.1 U9.15 | length 384.8
  Top Layer w10: R19.1 6089.88,6155 6140,6155 6235,6250 U9.15
$1N43: C13.1 D4.1 U9.16 | length 801.7
  Top Layer w10: U9.16 6185.37,6302.39 D4.1 ; v1(6255,6865) 6255,6943.43 C13.1
  Bottom Layer w10: v1(6180,6490) 6160,6490 6090,6560 6090,6700 v1(6255,6865)
$1N46: R25.2 U9.6 | length 215.6
  Top Layer w10: R25.2 6435,5806.69 U9.6
$1N52: D6.1 D7.1 U16.1 U22.2 U23.2 | length 3817.7
  Top Layer w10: U23.2 U22.2 3690,6454.38 U16.1 3785,6455 3860,6530 4350.02,6530 D7.1 4540.35,6600.35 v1(4545,6605)
  Bottom Layer w10: v1(4545,6605) 4565,6625 5140,6625 5297.99,6467.01 6279.52,6467.01 6417.52,6605 v1(6960,6605)
$1N56: D8.1 L3.1 U16.2 | length 450.2
  Top Layer w10: U16.2 3715.61,6480 v1(3745,6480) ; v1(3765,6420) 3779.64,6405.35 D8.1 3861.41,6404.31 L3.1
  Bottom Layer w10: v1(3745,6480) 3765,6460 v1(3765,6420)
$1N60: C20.1 R28.2 U14.1 U16.3 | length 1066.6
  Top Layer w10: U16.3 3760,6555 3785,6580 3785,6663.31 R28.2 4037.76,6775 U14.1 4197.24,6772.76 4285,6685 v1(4285,6670)
  Bottom Layer w10: C20.1 v1(4285,6670)
$1N63: LED3.2 U15.1 | length 224
  Top Layer w10: U15.1 3385,5395 3500.14,5279.86 LED3.2
$1N91: LED2.2 R27.1 | length 101.9
  Top Layer w10: LED2.2 4870,3251.61 R27.1
$1N92: LED1.2 R26.1 | length 101.9
  Top Layer w10: LED1.2 4685,3251.61 R26.1
$1N109: R2.1 R3.1 R4.1 | length 1924.7
  Top Layer w10: R2.1 7953.19,4349.88 R3.1 8023.31,3991.7 R4.1
$1N119: R43.1 R47.2 U1.7 | length 3848.5
  Top Layer w10: U1.7 3170,5840 v1(3180,5830) ; v1(3515,4285) 3515,4128.86 R43.1 ; v1(3520,5640) 3696.7,5640 R47.2
  Bottom Layer w10: v1(3180,5830) 3180,5740 3280,5640 v1(3520,5640) ; v1(3515,4285) 3515,4945 3575,5005 3575,5465 3761.7,5651.69 R47.2
$1N120: R44.1 R48.2 U2.7 | length 1062.5
  Top Layer w10: U2.7 v1(7440,5545) ; R48.2 8297.17,5578.31 R44.1
  Bottom Layer w10: v1(7440,5545) 7595,5545 7685,5455 7920,5455 7985,5520 R48.2
$1N121: R46.2 R48.1 U2.6 | length 1466
  Top Layer w10: U2.6 v1(7440,5495) ; R48.1 R46.2
  Bottom Layer w10: v1(7440,5495) 7625.18,5495 7679.19,5440.98 7925.81,5440.98 7979.82,5495 8105,5495 8125,5515 8125,5851.69 R48.1
$1N122: R45.2 R47.1 U1.6 | length 3601.2
  Top Layer w10: R47.1 3285,5705 3230,5760 3230,5820 3160,5890 U1.6 3050,5890 3025,5865 3025,4838.86 3786.19,4077.67 3786.19,3903.81 4285,3405 R45.2
$1N123: R39.1 R41.2 U1.5 | length 3501.2
  Top Layer w10: U1.5 3150,5940 v1(3165,5925) ; R39.1 4456.69,3627.16 R41.2
  Bottom Layer w10: v1(3165,5925) 3260,5830 4255,5830 4456.69,5628.31 R39.1
$1N124: R40.1 R42.2 U2.5 | length 893.7
  Top Layer w10: U2.5 v1(7420,5445) ; v1(7530,5460) 7662.52,5592.52 7662.52,5760.87 7705,5803.35 R40.1 R42.2
  Bottom Layer w10: v1(7420,5445) 7434.08,5459.08 7529.08,5459.08 v1(7530,5460)
$1N139: R34.1 R38.2 U2.1 | length 726.4
  Top Layer w10: U2.1@7153.82,5595 7275,5595 7423.31,5743.31 R38.2 7466.14,5742.16 R34.1
$1N140: R32.1 R37.2 U1.1 | length 1244.4
  Top Layer w10: R32.1 R37.2 ; U1.1 v1(3400,5790)
  Bottom Layer w10: R37.2 3468.3,5288.31 3542.99,5362.99 3542.99,5717.01 3520,5740 3450,5740 v1(3400,5790)
$1N141: R36.2 R38.1 U2.2 | length 1015.6
  Top Layer w10: U2.2 7090,5545 7080,5555 7080,5875 7365,6160 7461.69,6160 R38.1 R36.2
$1N142: R35.2 R37.1 U1.2 | length 1075.9
  Top Layer w10: R35.2 3190,6120.3 3190,5895 3245,5840 U1.2 3395,5840 3450,5785 3450,5695 3385,5630 3221.7,5630 R37.1
$1N144: C1.2 R1.2 R5.2 U3.3 | length 651.9
  Top Layer w10: C1.2 7731.69,4946.69 R1.2 R5.2 7905,5018.31 U3.3
$1N147: R30.1 R33.2 U2.3 | length 989.1
  Top Layer w10: U2.3 7105,5495 7060,5540 7060,6105 7116.69,6161.69 R30.1 R33.2
$1N148: R29.1 R31.2 U1.3 | length 998.2
  Top Layer w10: R31.2 3210,6069.46 3210,5935 3255,5890 U1.3 3425,5890 3475,5840 3475,5590 3445,5560 R29.1
$1N200: L1.1 P1.2 | length 783.2
  Top Layer w10: L1.1 5765,7933.15 P1.2
A3V3: C21.2 L2.2 | length 202.4
  Top Layer w20: C21.2 L2.2
ADC_Iin: C26.2 R43.2 U24.26 | length 2759.1
  Top Layer w10: R43.2 4025,3185 v1(4065,3225) ; v1(4310,4495) 4555,4495 v1(4560,4490)
  Bottom Layer w10: v1(4065,3225) 4400,3560 ; v1(4560,4490) 5920,4490 U24.26
ADC_IIN:  | length 972.3
  Bottom Layer w10: 4310,4495 4400,4405 4400,3560
ADC_Iout: C27.2 R44.2 U24.28 | length 518
  Top Layer w10: R44.2 C27.2
  Bottom Layer w10: 8260,5230 8415,5385 ; R44.2 8415,6233.86
ADC_IOUT:  | length 3412.5
  Bottom Layer w10: 5920,4690 6460,5230 8260,5230 ; 8415,5385 8415,6233.86
ADC_VGND: C2.2 R3.2 U24.29 | length 3288.1
  Top Layer w10: U24.29 6235,5105 v1(6400,5105) ; C2.2 8436.69,4668.31 R3.2
  Bottom Layer w10: v1(6400,5105) 7140,5105 7290,4955 8270,4955 8435,4790 C2.2
ADC_Vin: C23.2 R32.2 U24.25 | length 2893.6
  Top Layer w10: R32.2 3656.14,3830 v1(3730,3830) ; C23.2 4560,4280 v1(4565,4275)
  Bottom Layer w10: C23.2@4290,4280 C23.2 ; v1(4565,4275) 4735,4445 5975,4445 U24.25
ADC_VIN:  | length 828.4
  Bottom Layer w10: 3730,3830 3980,3830 4200,4050 4200,4190 4290,4280
ADC_Vout: C25.2 R34.2 U24.27 | length 1244.5
  Top Layer w10: C25.2 4380,4065 v1(4510,4195)
  Bottom Layer w10: v1(4510,4195) 4510,4472.52 4550.48,4512.99 4552.99,4512.99 4650,4610 ; v1(6020,4690) 6275,4945 ; 6900,4945 v1(7010,5055)
  other v1: 6020,4690
ADC_VOUT:  | length 3415.6
  Top Layer w10: 7010,5055 7325,5370 7395,5370 7425,5340 8183.86,5340 8233.86,5390
  Bottom Layer w10: 4650,4610 5940,4610 6020,4690 ; 6275,4945 6900,4945
AGND: C2.1 C21.1 C23.1 C25.1 C26.1 C27.1 L4.2 | length 10159.2
  Top Layer w10: C21.1 L4.2
  Top Layer w20: v1(3470,3765) 3840,3395 4065,3395 4415,3045 7765,3045 8100,3380 8400,3380 8485,3465 8485,4130 8235,4380 C2.1 8485,4920 8485,6600 8400,6685 C27.1
  Bottom Layer w10: C23.1 C26.1
  Bottom Layer w20: v1(3470,3765) 3410,3825 3410,3925 3590,4105 3789.36,4105 C21.1
Gate1H: Q2.1 R6.2 R18.2 | length 542.3
  Top Layer w10: R18.2 4865.12,6925.24 R6.2 5074.57,7130 Q2.1@5075,7130.43
Gate1L: Q3.1 R10.1 R23.2 | length 1649.2
  Top Layer w10: R10.1 4920,7564.88 v1(4920,7610)
  Bottom Layer w10: R10.1@4780.06,7424.94 4965,7240 5355,7240 5495,7100 v1(5495,6840.12) ; v1(4920,7610) 4920,7680.43 Q3.1@5080,7840.43
Gate2H: Q1.1 R7.1 R19.2 | length 852.1
  Top Layer w10: R19.2 5985,7170 v1(6110,7295)
  Bottom Layer w10: v1(6110,7295) 6110,7670.43
GATE2H:  | length 608
  Top Layer w10: 6295,7855.43 6295.31,7855.43 6540,8100.12
  Bottom Layer w10: 6110,7670.43 6295,7855.43
Gate2L: Q4.1 R11.1 R24.2 | length 586.6
  Top Layer w10: Q4.1@6300,7160.43 6519.45,7160.43 v1(6519.88,7160) 6705,6974.88 R24.2
GND: C1.1 C3.1 C4.2 C5.2 C6.2 C7.2 C8.2 C9.2 C10.2 C11.2 C14.1 C15.1 C16.1 C17.1 C18.1 C19.1 C22.1 C24.1 D1.2 D2.2 D5.2 D8.2 L4.1 LED1.1 LED2.1 LED3.1 Q3.3 Q4.3 R4.2 R4.3 R5.1 R8.1 R9.1 R10.2 R11.2 R12.2 R13.2 R14.2 R15.2 R16.2 R17.2 R28.1 R29.2 R30.2 R41.1 R46.1 SW1.1 SW2.1 U1.4 U2.4 U3.4 U4.1 U5.1 U6.1 U7.1 U8.4 U8.5 U8.9 U9.4 U9.5 U9.9 U10.1 U11.1 U12.1 U13.1 U16.5 U16.6 U16.7 U16.8 U17.1 U18.1 U19.1 U20.1 U21.1 U22.1 U23.1 U24.19 U24.37 U24.39 U24.40 | length 9038
  Top Layer w10: U16.8 U16.7 U16.6 U16.5 3483.31,6608.91 R28.1 ; C16.1 5330,6530 v1(5330,6227.02) ; v1(5476.44,3135) 5538.98,3135 SW1.1 ; v1(6335,5927.98) v1(6385,5927.98) ; C17.1 6535,6575 v1(6535,6302.02)
  Top Layer w20: U1.4 3470,5940 U21.1 ; LED3.1 3699.87,5280.13 3812.5,5167.5 U12.1 3844.45,5095.55 3870,5070 4005,5070 4030.55,5044.45 U13.1 ; LED1.1 4685.14,3164.86 4720,3130 4811.61,3130 LED2.1 4923.66,3135 v1(5476.44,3135) ; SW2.1 6285,3125 U10.1 ; R17.2 7080.12,5445 U2.4 ; C1.1 7505,4770 7803.82,4770 U3.4
  Top Layer w40: C22.1 3475,5050 3601.47,5176.48 LED3.1 ; D5.2 3699.64,4665.35 U17.1 ; L4.1 U17.1@3827.18,4537.82 ; R12.2 3840,7534.28 R8.1 4049.88,7739.88 U4.1 4419.65,7785 C5.2 C4.2 4289.29,8160.35 D1.2 ; R10.2 U5.1 4965.43,8155 Q3.3 ; C6.2 6960,8014.65 C7.2 U7.1@7330.37,7795.35 ; U7.1@7330.37,7794.63 U7.1@7330.37,7795.35 ; D2.2 U7.1@7330.37,7795.35 ; U7.1@7340,7785 7380.12,7744.88 R9.1 7674.28,7715.6 R13.2 7750,7449.28 v1(7750,7280)
  Bottom Layer w40: v1(7750,7280) 7750,7108.86 R46.1
  other v1: 5130,5852.98 5180,5852.98 3090,5995 3125.78,5995 3235,5995 3267.7,5995 3299.29,5995 3089.94,6030 3125.28,6030 3160,6030 3236.14,6030 3268.27,6030 3299.6,6030 3859.63,6594.65 4890,7405.6 4925,7406.13 4890,7450.58 4925,7450.58 4890,7485 4925,7485 6145,8025 6095.41,8026.19 6145,8083.22 6095.41,8084.83 6095.41,8135 6140,8135 5195,8144.02 5245,8144.02 5195,8197.04 5245,8197.04 6140,8203.72 6100,8205.32 5195,8250.86 5245,8251.66 6100,8266.38 6140,8265.57 5195,8295 5245,8295 6140,8308.15 6100,8308.95 5195,8335 5242.94,8335 6100,8350 6140,8350 4980,8415 5043.52,8415 5106.98,8415 5165.62,8415 6195,8425 6240.11,8425 6289.11,8425 6336.5,8425 4980,8455 5041.11,8455 5106.98,8455 5165.62,8455 6195,8465 6240.11,8465 6288.31,8465 6336.5,8465
HS-1: C12.2 P1.1 Q2.3 Q3.2 R6.1 U8.14 | length 3924.9
  Top Layer w10: U8.14 C12.2 ; v1(5140,6960) 5140,6741.57 C12.2 ; v1(5225,6740) 5166.57,6681.57 C12.2 ; v1(5255,7165) 5255,7379.57 Q2.3 5075,7565 4925,7715 4925,7900.01 Q3.2 5495.01,8055.01 P1.1
  Bottom Layer w10: R6.1 4379.88,7005 5095,7005 v1(5140,6960) ; v1(5225,6740) 5255,6770 v1(5255,7165)
HS-2: C13.2 L1.2 Q1.3 Q4.2 R7.2 U9.14 | length 3070.1
  Top Layer w10: L1.2 6093.15,7375.01 Q4.2 ; U9.14 v1(6285,6505) ; C13.2 6263.43,6776.57 6115,6925 6115,7190.01 Q4.2 ; v1(6585,7835) 6585,7534.88 R7.2 6425.12,7375.01 Q4.2
  Bottom Layer w10: v1(6285,6505) C13.2 ; Q1.3 6585.43,8284.58 6635,8235 6635,8005 6585,7955 v1(6585,7835)
I2C1_SCL: U11.3 U24.16 | length 1320.9
  Top Layer w10: U24.16 6220,4140 6290,4210 6735,4210 7150,3795 U11.3
I2C1_SDA: U11.4 U24.17 | length 1284.5
  Top Layer w10: v1(6440,4305) 6880,4305 U11.4
  Bottom Layer w10: U24.17 6320,4185 v1(6440,4305)
KEY1: C18.2 R20.1 SW1.2 U24.11 | length 964.2
  Top Layer w10: U24.11 5720,3730 C18.2 5715,3490.12 R20.1 v1(5720.12,3370)
  Bottom Layer w10: v1(5720,3130) 5720.12,3130.12 v1(5720.12,3370)
KEY2: C19.2 R21.1 SW2.2 U24.12 | length 969.2
  Top Layer w10: U24.12 5830,4080 C19.2 5830,3490.12 R21.1 v1(5829.88,3370)
  Bottom Layer w10: v1(5829.88,3125) v1(5829.88,3370)
LEDG: R27.2 U24.33 | length 1683.1
  Top Layer w10: v1(5400,4385) 5420,4405 U24.33
  Bottom Layer w10: R27.2 4870,3790 4645,4015 4645,4220 4785,4360 5375,4360 v1(5400,4385)
LEDY: R26.2 U24.34 | length 1532.7
  Top Layer w10: v1(5320,4400) U24.34
  Bottom Layer w10: R26.2 4685,3955.18 4630.98,4009.19 4630.98,4225.81 4779.19,4374.02 5292.32,4374.02 5318.31,4400 v1(5320,4400)
P1V65: R39.2 R40.2 U3.1 U3.2 | length 6319.6
  Top Layer w10: R39.2 4378.31,3470 4955,3470 5130,3295 7220,3295 7895,3970 v1(7895,4125) ; R40.2 7853.31,5425 7915,5425 7955,5385 v1(7955,5370) ; v1(7955,5260) U3.2 U3.1 8078.82,4821.18 v1(8100,4800)
  Bottom Layer w10: v1(7895,4125) 7895,4520 8120,4745 8120,4780 v1(8100,4800) ; v1(7955,5260) v1(7955,5370)
P3V3: L2.1 R1.1 R2.2 R20.2 R21.2 U13.4 U17.2 U24.20 U24.38 | length 7344.3
  Top Layer w20: U17.2 4027.18,4537.82 4027.18,4420.56 ; 4025,4628.57 4559.2,5162.77 v1(4647.77,5162.77) ; L2.1 4027.18,4420.56 ; v1(6620,3585) 6525,3490 R21.2 6280.12,3330 5264.88,3330 R20.2 5109.88,3720.12 4900,3930 4545,3930 v1(4525,3950) 4505,3970 4250,3970 4220,4000 4220,4375 4174.44,4420.56 4027.18,4420.56 ; R2.2 7213.43,4960.12 R1.1
  Top Layer w40: U13.4 4025,4623.07 U17.2
  Bottom Layer w20: v1(4647.77,5162.77) 4832.23,5162.77 4920,5075 U24.38 ; v1(6620,3585) U24.20 7025,4495 R2.2
P5V: C3.2 C14.2 C15.2 C22.2 C24.2 D5.1 R22.1 R25.1 U1.8 U2.8 U3.8 U8.3 U8.8 U9.3 U9.8 U10.2 U11.2 U12.4 U13.3 U15.2 U21.2 U24.18 | length 12465.1
  Top Layer w10: U8.3 5080,5915
  Top Layer w20: U12.4 4367.5,5392.5 4670,5695 C14.2 4810,5855 4915,5960 5055,5960 5080,5935 5080,5915 5125,5960 5300,5960 5330,5930 U8.8 5518.72,5852.98 R22.1 5835,5735 C15.2 6110,6010 6320,6010 ; U9.3 6285,5975 6320,6010 ; U24.18 6420,3835 6560,3695 U11.2 7635,4040 v1(7635,4305) ; U10.2 6605,3245 v1(6825,3245) ; C24.2 6880,5950 6780,5850 6780,5741.69 R25.1 6665,5740 6535,5870 U9.8 6535,5965 6490,6010 6320,6010 ; v1(7370,5330) 7370,4770 7560,4580 C3.2 7690,4525 7955,4525 8005,4575 U3.8
  Top Layer w40: U1.8 3088.82,5596.18 3220,5465 3697.76,5465 U15.2 ; D5.1 3654.64,4854.65 3675,4875 C22.2 3810,5040 3849.45,5000.55 U13.3 ; U21.2 3760,5920 3935,5745 U12.4 3932.5,5395 U15.2 ; v1(3750,5305) 3767.76,5322.76 U15.2
  Bottom Layer w20: v1(6825,3245) 6970,3245 7000,3275 7000,3425 7270,3695 U11.2 ; C24.2 7045,5950 7125,5870 7125,5685 7155,5655 7310,5655 v1(7370,5595) v1(7370,5330) ; v1(7635,4305) C3.2
  Bottom Layer w40: C22.2 3675,5230 v1(3750,5305)
P12V: C16.2 C17.2 C20.2 D3.2 D4.2 L3.2 U8.11 U9.11 U12.3 U14.2 U18.2 U19.2 U20.2 | length 3429.9
  Top Layer w10: U12.3 4062.5,5167.5 v1(4135,5240)
  Top Layer w20: U9.11 C17.2
  Top Layer w40: C20.2 4594.98,6190 D3.2 ; U8.11 C16.2 ; v1(5450,6430) 5699.65,6679.65 D4.2 6230.35,6679.65 C17.2
  Bottom Layer w10: U18.2 4135,5465 v1(4135,5240)
  Bottom Layer w40: v1(4980,6570) 5090,6570 C16.2 v1(5450,6430)
PWM1H: C8.1 R14.1 U8.1 U24.5 | length 2273.1
  Top Layer w10: U8.1 4980,5669.88 R14.1 4840.12,5310.12 C8.1 4497.93,4967.93 4497.93,4622.07 4785,4335 4875,4335 U24.5
PWM1L: C9.1 R15.1 U8.2 U24.6 | length 2296.1
  Top Layer w10: U8.2 5030,5610.12 R15.1 4955,5534.88 C9.1 4562.93,4917.93 4562.93,4632.07 4830,4365 4945,4365 U24.6
PWM2H: C10.1 R16.1 U9.1 U24.7 | length 3420.5
  Top Layer w10: U24.7 5620,4390 6720,4390 6802.07,4472.07 6802.07,4872.93 6635,5040 6525,5040 C10.1 6275.12,5300.12 R16.1 6185,5625.12 U9.1
PWM2L: C11.1 R17.1 U9.2 U24.8 | length 3372.8
  Top Layer w10: U24.8 5459.93,4090 5697.92,4327.99 6767.99,4327.99 6860,4420 6860,4860 6665,5055 6625,5055 C11.1 6374.88,5305.12 R17.1 6227.93,5686.95 6227.93,5920.91 U9.2
VIN+: C4.1 C5.1 D1.1 D7.2 P2.2 Q2.2 R8.2 R31.1 U4.2 U5.2 | length 5288
  Top Layer w10: C4.1@4419.29,8349.65 C4.1
  Top Layer w40: R31.1 3330.42,6805.42 3435,6910 4299.27,6910 D7.2 4419.63,7454.27 C5.1 ; P2.2 3585.12,8350.12 R8.2 3840.47,8349.65 D1.1 ; v1(3970,7965) 3970,8225.01 D1.1 ; U4.2 4220.35,7459.65 C5.1 ; C4.1@4419.29,8349.65 D1.1 ; C4.1 4425.35,8355 U5.2 ; Q2.2 4539.64,7345.01 C5.1
  Bottom Layer w40: v1(3970,7965) 3970,7710 U4.2
VIN-: P2.1 R12.1 R35.1 R45.1 | length 5135.1
  Top Layer w40: v1(3075,4120) 3075,4021.14 R45.1 ; R35.1 3120.42,7056.14 R12.1 3594.28,7740.72 P2.1
  Bottom Layer w40: v1(3075,4120) 3035,4160 3035,6714.7 R35.1
VOUT+: C6.1 C7.1 D2.1 D6.2 P3.1 Q1.2 R9.2 R33.1 U6.2 U7.2 | length 4317.9
  Top Layer w40: Q1.2 6414.99,8190 U6.2 6705.35,8355.35 C6.1 6965.71,8339.65 D2.1 7345.1,8355.12 R9.2 7954.88,8355.12 P3.1 ; D6.2 7139.52,6784.65 R33.1 7235,7449.29 7219.65,7464.65 ; C7.1 7219.65,7464.65 ; U7.2@7340,7585 7331.92,7585 7219.65,7472.72 7219.65,7464.65
  Bottom Layer w40: U7.2@7340,7585 7645,7890 R9.2
VOUT-: P3.2 R13.1 R36.1 R42.1 | length 1505.1
  Top Layer w40: R36.1 7703.74,6875.12 R42.1 7915.72,7084.58 R13.1 8160,7769.28 P3.2
pads on no net: U3.5 U3.6 U3.7 U8.7 U8.12 U8.13 U9.7 U9.12 U9.13 U12.2 U13.2 U16.4 U16.9 U24.1 U24.2 U24.3 U24.4 U24.9 U24.10 U24.13 U24.14 U24.15 U24.21 U24.22 U24.23 U24.24 U24.30 U24.31 U24.32 U24.35 U24.36

## Polygon pours and split planes (outlines as drawn)
GND on Top Layer (solid, remove dead copper, pour order 0): 3040,6990 3040,8580 8510,8580 8510,6990
GND on Bottom Layer (solid, remove dead copper, pour order 8): 3015,8605 3015,6985 8515,6985 8515,8605
GND on Bottom Layer (solid, remove dead copper, pour order 10): 3013.42,6878.42 3080,6945 8510,6945 8520,6935 8520,3568.08 cw(c7991.7,3488.94) 8454.11,3221.47 8254.42,3101.78 cw(c8002.8,3455.34) 7946.92,3025 3533.08,3025 cw(c3518.6,3432.88) 3244.69,3130.31 3118.73,3256.27 cw(c3421.3,3530.19) 3013.42,3544.66
P12V on Top Layer (solid, remove dead copper, pour order 2): 3970,6435 3970,5100 4400,5100 4400,6435
AGND on Top Layer (solid, remove dead copper, pour order 4): 3734.03,4650 3734.03,3935 4390,3935 4390,4650

## Keep-outs
Board Outline Layer:
  the board outline again, w10

## Silkscreen, mask and mechanical layers (free items; w line width, h text height)
Top Silkscreen Layer:
  lines w10: 5670.9,5030 5670.9,7025 ; 3065,7025 3065,8560 8465,8560 8465,7025 3065,7025 ; 4180,5020 4180,7015 7095,7015 7095,5020 4180,5020
  text "3122005607骆泰宇" at 3355,8680 h120
  text "四开关Buck-Boost变换器（48V）" at 4605,8645 h196.85
  text "Vin+" at 3325,8515 h120 r270
  text "Vout+" at 8214.1,8280.9 h120 r90
  text "输入端" at 3580,8230 h120 r270
  text "输出端" at 7950,7875 h120 r90
  text "Vin-" at 3330,7825 h120 r270
  text "Vout-" at 8225,7490 h120 r90
  text "主功率电路" at 7790,7085 h120
  text "信号调理" at 5435,5050 h120